# Altium PCB mach nhan tin hieu.PcbDoc (part 1 of 2)
Units mm, origin at the board's own origin, x right, y up, seen from the top; angles counter-clockwise.
Board outline 399.55 x 164.38 mm, 2 copper layers (Top Layer, Bottom Layer); 171 components, 209 nets, 595 pads, 30 vias.
Unrouted connection lines stored in the file: 1.
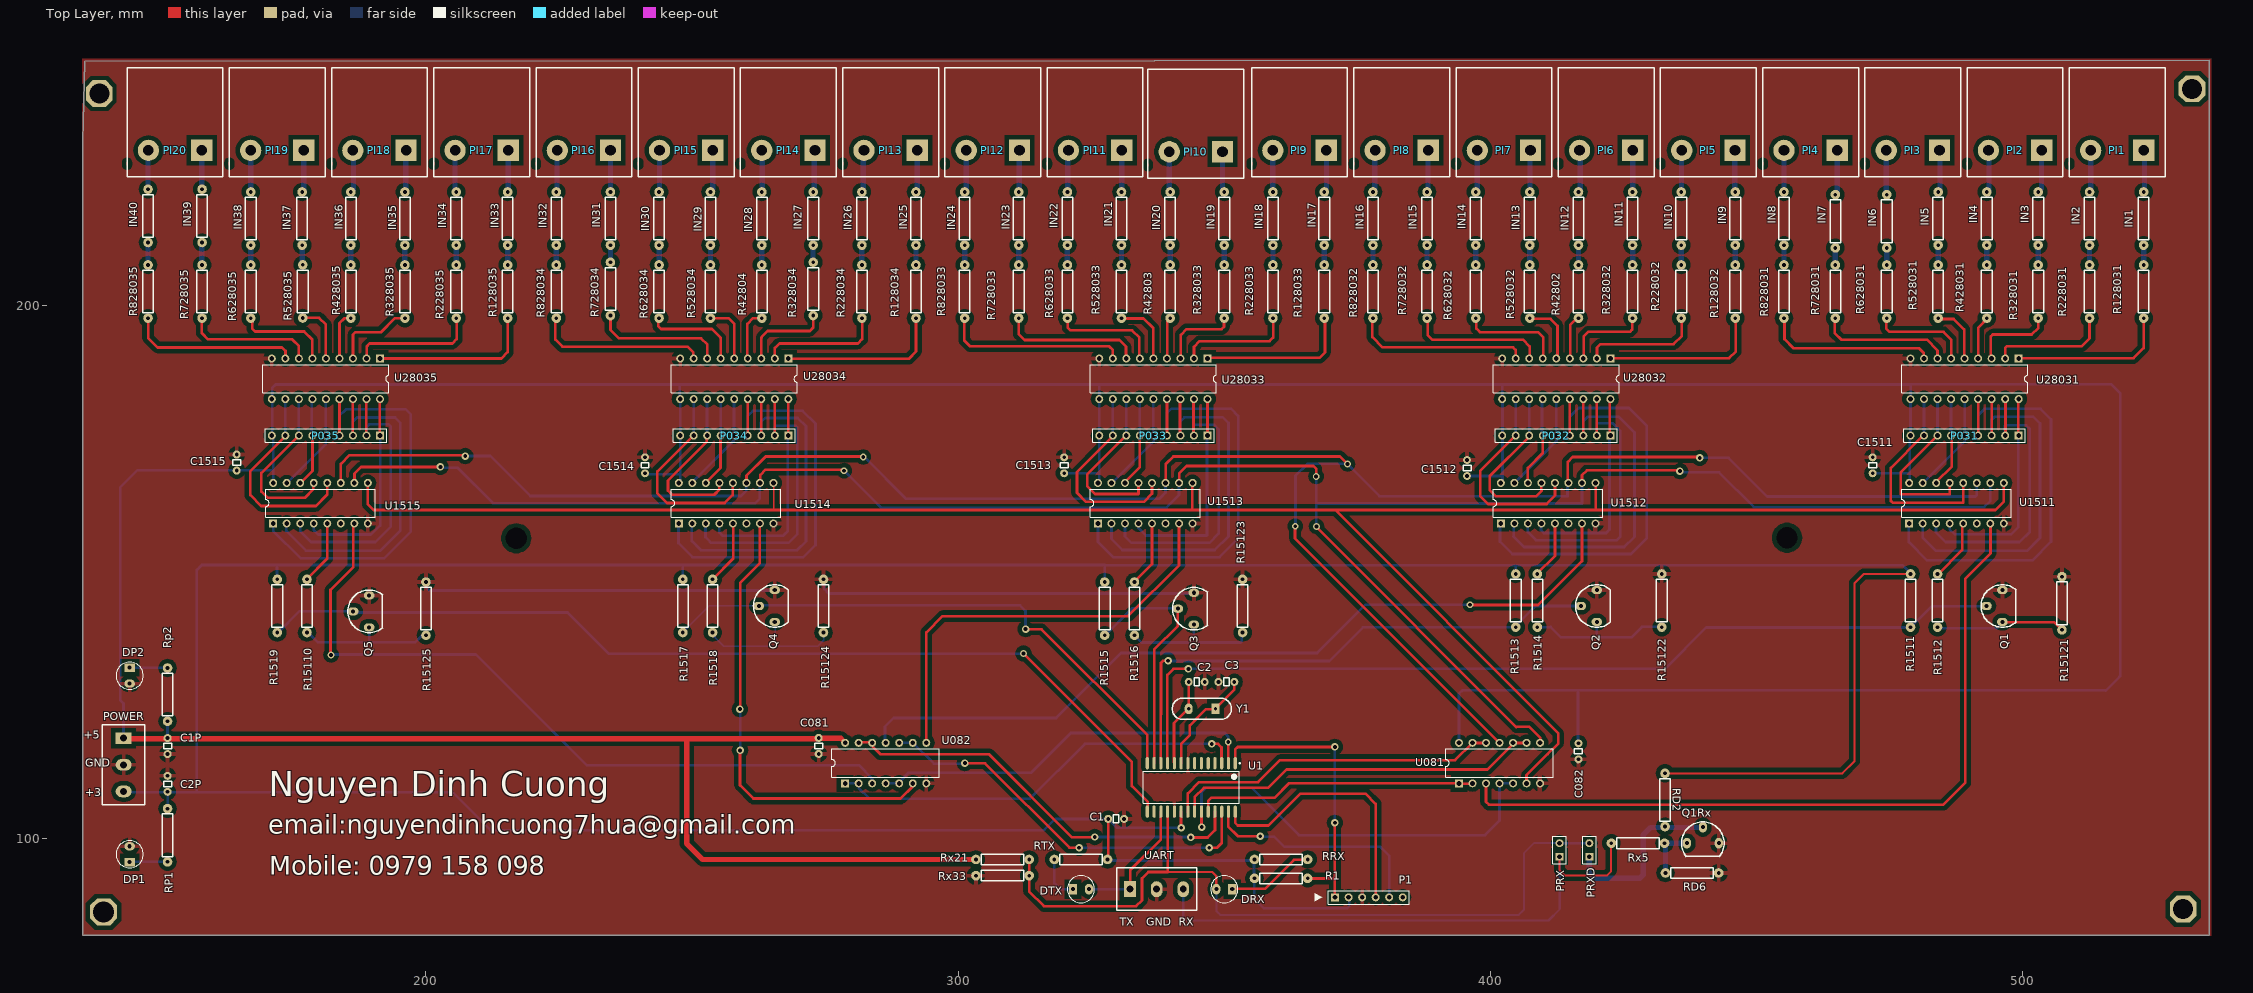
[diagram p0: Top Layer view]
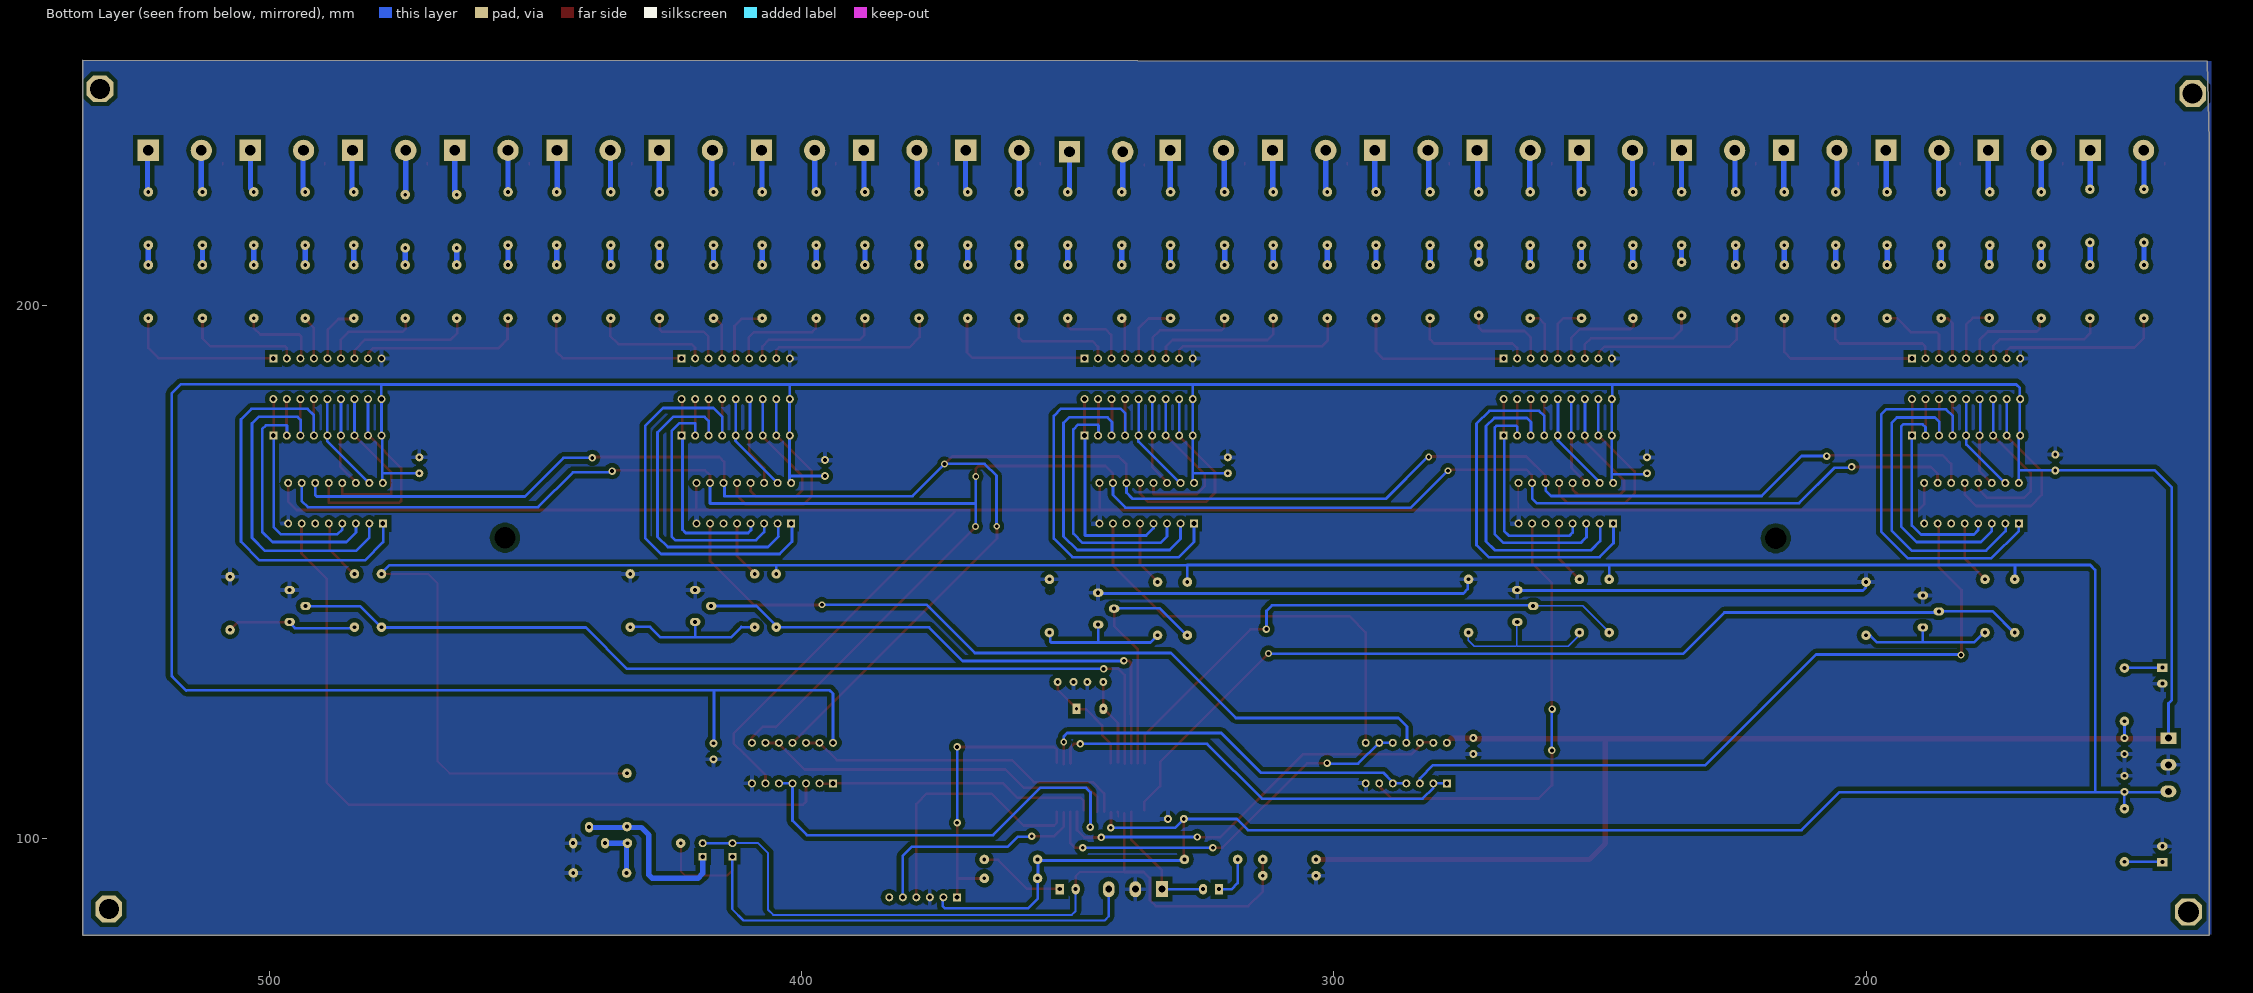
[diagram p1: Bottom Layer view, seen from below]

## Layer stack, top to bottom
Top Layer: signal copper 0.0356
Dielectric: dielectric 0.32, FR-4, Dk 4.8
Bottom Layer: signal copper 0.0356

## Board outline
135.55,230.85 135.55,81.8 535.1,81.8 535.075,246.175 336.85,246.025 135.925,245.975

## Design rules (kind name [scope] priority, off if disabled: settings)
Clearance [All] p1: gap=0.8
ComponentClearance [All] p1: gap=0.254 collisioncheckmode=3 verticalgap=0.254
PlaneClearance [All] p1: clearance=0.8
PlaneConnect [All] p1: planeconnectstyle=Relief reliefexpansion=1 reliefentries=4 reliefconductorwidth=1 reliefairgap=0.8
PolygonConnect [All] p1: connectstyle=Relief reliefconductorwidth=0.8 reliefentries=4 polygonreliefangle="90 Angle"
RoutingVias [All] p1: holewidth=0.711 width=1.27 viastyle="Through Hole" minholewidth=0.711 minwidth=1.27 maxholewidth=0.711 maxwidth=1.27
SolderMaskExpansion [All] p1: expansion=0.102
TestPointUsage [All] p1: valid=0 allowmultiple=FALSE
Testpoint [All] p1: side=15 testpointundercomponent=TRUE minsize=1.016 maxsize=2.54 preferedsize=1.524 minholesize=0 maxholesize=1.016 preferedholesize=0.813 testpointgrid=0.025 style=1023 order=0-112345678
Width [All] p1: maxlimit=0.4 minlimit=0.4 preferedwidth=0.4
16 further rules are at their usual default settings.

## Components (designator, comment, footprint, x,y, rotation, side; value= is the part's Value field where it differs from the comment)
C1 "Cap" tu_gom 330.2,103.632 r0 top
C1P "Cap" tu_gom 151.5,116.811 r270 top
C2 "Cap2" tu_gom 345.341,129.357 r0 top
C2P "Cap" tu_gom 151.5,110.715 r90 top
C3 "Cap2" tu_gom 349.913,129.357 r180 top
C081 "Cap" tu_gom 273.812,116.84 r270 top
C082 "Cap" tu_gom 416.56,115.824 r270 top
C1511 "Cap" tu_gom 471.824,170.559 r90 top
C1512 "Cap" tu_gom 395.624,170.051 r90 top
C1513 "Cap" tu_gom 319.932,170.559 r90 top
C1514 "Cap" tu_gom 241.192,170.559 r90 top
C1515 "Cap" tu_gom 164.484,171.067 r90 top
DP1 "LED0" LED_3 144.388,96.491 r90 top
DP2 "LED0" LED_3 144.388,131.035 r270 top
DRX "LED0" LED_3 350.52,90.424 r180 top
DTX "LED0" LED_3 322.58,90.424 r0 top
IN1 "Res" R_Nor 522.732,216.408 r270 top (schematic designator R111)
IN2 "Res" R_Nor 512.572,216.408 r270 top (schematic designator R2)
IN3 "Res" R_Nor 502.92,216.408 r270 top (schematic designator R3)
IN4 "Res" R_Nor 493.268,216.408 r270 top (schematic designator R4)
IN5 "Res" R_Nor 484.124,216.408 r270 top (schematic designator R5)
IN6 "Res" R_Nor 474.472,215.9 r270 top (schematic designator R6)
IN7 "Res" R_Nor 464.82,215.9 r270 top (schematic designator R7)
IN8 "Res" R_Nor 455.168,216.408 r270 top (schematic designator R8)
IN9 "Res" R_Nor 446.024,216.408 r270 top (schematic designator R9)
IN10 "Res" R_Nor 435.864,216.408 r270 top (schematic designator R10)
IN11 "Res" R_Nor 426.72,216.408 r270 top (schematic designator R11)
IN12 "Res" R_Nor 416.56,216.408 r270 top (schematic designator R12)
IN13 "Res" R_Nor 407.416,216.408 r270 top (schematic designator R13)
IN14 "Res" R_Nor 397.256,216.408 r270 top (schematic designator R14)
IN15 "Res" R_Nor 388.112,216.408 r270 top (schematic designator R15)
IN16 "Res" R_Nor 377.952,216.408 r270 top (schematic designator R16)
IN17 "Res" R_Nor 368.808,216.408 r270 top (schematic designator R17)
IN18 "Res" R_Nor 359.156,216.408 r270 top (schematic designator R18)
IN19 "Res" R_Nor 350.012,216.408 r270 top (schematic designator R19)
IN20 "Res" R_Nor 339.852,216.408 r270 top (schematic designator R20)
IN21 "Res" R_Nor 330.708,216.408 r270 top (schematic designator R21)
IN22 "Res" R_Nor 320.548,216.408 r270 top (schematic designator R22)
IN23 "Res" R_Nor 311.404,216.408 r270 top (schematic designator R23)
IN24 "Res" R_Nor 301.244,216.408 r270 top (schematic designator R24)
IN25 "Res" R_Nor 292.1,216.408 r270 top (schematic designator R25)
IN26 "Res" R_Nor 281.94,216.408 r270 top (schematic designator R26)
IN27 "Res" R_Nor 272.796,216.408 r270 top (schematic designator R27)
IN28 "Res" R_Nor 263.144,216.408 r270 top (schematic designator R28)
IN29 "Res" R_Nor 253.492,216.408 r270 top (schematic designator R29)
IN30 "Res" R_Nor 243.84,216.408 r270 top (schematic designator R30)
IN31 "Res" R_Nor 234.696,216.408 r270 top (schematic designator R31)
IN32 "Res" R_Nor 224.536,216.408 r270 top (schematic designator R32)
IN33 "Res" R_Nor 215.392,216.408 r270 top (schematic designator R33)
IN34 "Res" R_Nor 205.74,216.408 r270 top (schematic designator R34)
IN35 "Res" R_Nor 196.088,216.408 r270 top (schematic designator R35)
IN36 "Res" R_Nor 185.928,216.408 r270 top (schematic designator R36)
IN37 "Res" R_Nor 176.784,216.408 r270 top (schematic designator R37)
IN38 "Res" R_Nor 167.132,216.408 r270 top (schematic designator R38)
IN39 "Res" R_Nor 157.988,216.916 r270 top (schematic designator R39)
IN40 "Res" R_Nor 147.828,216.916 r270 top (schematic designator R40)
P1 "PICKIT3" HDR1X6 370.84,88.9 r0 top
P031 "Header 9" HDR1X9 499.256,175.639 r180 top
P032 "Header 9" HDR1X9 422.548,175.639 r180 top
P033 "Header 9" HDR1X9 346.856,175.639 r180 top
P034 "Header 9" HDR1X9 268.116,175.639 r180 top
P035 "Header 9" HDR1X9 191.408,175.639 r180 top
PI1 "Header 2" Header_nguon_20A 522.78,229.221 r180 top
PI2 "Header 2" Header_nguon_20A 503.576,229.221 r180 top
PI3 "Header 2" Header_nguon_20A 484.372,229.221 r180 top
PI4 "Header 2" Header_nguon_20A 465.168,229.221 r180 top
PI5 "Header 2" Header_nguon_20A 445.964,229.221 r180 top
PI6 "Header 2" Header_nguon_20A 426.76,229.221 r180 top
PI7 "Header 2" Header_nguon_20A 407.556,229.221 r180 top
PI8 "Header 2" Header_nguon_20A 388.352,229.221 r180 top
PI9 "Header 2" Header_nguon_20A 369.148,229.221 r180 top
PI10 "Header 2" Header_nguon_20A 349.679,228.967 r180 top
PI11 "Header 2" Header_nguon_20A 330.74,229.221 r180 top
PI12 "Header 2" Header_nguon_20A 311.535,229.221 r180 top
PI13 "Header 2" Header_nguon_20A 292.331,229.221 r180 top
PI14 "Header 2" Header_nguon_20A 273.127,229.221 r180 top
PI15 "Header 2" Header_nguon_20A 253.923,229.221 r180 top
PI16 "Header 2" Header_nguon_20A 234.719,229.221 r180 top
PI17 "Header 2" Header_nguon_20A 215.515,229.221 r180 top
PI18 "Header 2" Header_nguon_20A 196.311,229.221 r180 top
PI19 "Header 2" Header_nguon_20A 177.107,229.221 r180 top
PI20 "Header 2" Header_nguon_20A 157.903,229.221 r180 top
POWER "Header 3" HEADER3 143.256,113.792 r270 top
PRX "Header 2" HDR1X2 413.004,96.52 r90 top (schematic designator PUA2)
PRXD "Header 2" HDR1X2 418.592,96.52 r90 top (schematic designator PUA1)
Q1 "C1815" C1815 495.7,143.127 r90 top
Q1Rx "C1815" C1815 439.42,99.568 r0 top
Q2 "C1815" C1815 419.5,143.127 r90 top
Q3 "C1815" C1815 343.808,142.619 r90 top
Q4 "C1815" C1815 265.068,143.127 r90 top
Q5 "C1815" C1815 188.868,142.111 r90 top
R1 "Res3" R_Nor 360.68,92.456 r180 top
R1511 "Res3" R_Nor 478.936,144.651 r90 top
R1512 "Res3" R_Nor 484.016,144.651 r90 top
R1513 "Res3" R_Nor 404.768,144.651 r90 top
R1514 "Res3" R_Nor 408.832,144.651 r90 top
R1515 "Res3" R_Nor 327.552,143.127 r90 top
R1516 "Res3" R_Nor 333.14,143.127 r90 top
R1517 "Res3" R_Nor 248.304,143.635 r90 top
R1518 "Res3" R_Nor 253.892,143.635 r90 top
R1519 "Res3" R_Nor 172.104,143.635 r90 top
R15110 "Res3" R_Nor 177.692,143.635 r90 top
R15121 "Res3" R_Nor 507.384,144.143 r90 top
R15122 "Res3" R_Nor 432.2,144.651 r90 top
R15123 "Res3" R_Nor 353.46,143.635 r90 top
R15124 "Res3" R_Nor 274.72,143.635 r90 top
R15125 "Res3" R_Nor 200.044,143.127 r90 top
R42802 "Res3" R_Nor 416.56,202.692 r90 top
R42803 "Res3" R_Nor 339.852,202.692 r90 top
R42804 "Res3" R_Nor 263.144,202.692 r90 top
R128031 "Res3" R_Nor 522.732,202.692 r90 top
R128032 "Res3" R_Nor 446.024,202.692 r90 top
R128033 "Res3" R_Nor 368.808,202.692 r90 top
R128034 "Res3" R_Nor 292.1,202.692 r90 top
R128035 "Res3" R_Nor 215.392,202.692 r90 top
R228031 "Res3" R_Nor 512.572,202.692 r90 top
R228032 "Res3" R_Nor 435.864,202.692 r90 top
R228033 "Res3" R_Nor 359.156,202.692 r90 top
R228034 "Res3" R_Nor 281.94,202.692 r90 top
R228035 "Res3" R_Nor 205.74,202.692 r90 top
R328031 "Res3" R_Nor 502.92,202.692 r90 top
R328032 "Res3" R_Nor 426.72,202.692 r90 top
R328033 "Res3" R_Nor 350.012,202.692 r90 top
R328034 "Res3" R_Nor 272.796,203.2 r90 top
R328035 "Res3" R_Nor 196.088,202.692 r90 top
R428031 "Res3" R_Nor 493.268,202.692 r90 top
R428035 "Res3" R_Nor 185.928,202.692 r90 top
R528031 "Res3" R_Nor 484.124,202.692 r90 top
R528032 "Res3" R_Nor 407.416,202.692 r90 top
R528033 "Res3" R_Nor 330.708,202.692 r90 top
R528034 "Res3" R_Nor 253.492,202.692 r90 top
R528035 "Res3" R_Nor 176.898,202.726 r90 top
R628031 "Res3" R_Nor 474.472,202.692 r90 top
R628032 "Res3" R_Nor 397.256,202.692 r90 top
R628033 "Res3" R_Nor 320.548,202.692 r90 top
R628034 "Res3" R_Nor 243.84,202.692 r90 top
R628035 "Res3" R_Nor 167.132,202.692 r90 top
R728031 "Res3" R_Nor 464.82,202.692 r90 top
R728032 "Res3" R_Nor 388.112,202.692 r90 top
R728033 "Res3" R_Nor 311.404,202.692 r90 top
R728034 "Res3" R_Nor 234.696,203.2 r90 top
R728035 "Res3" R_Nor 157.988,202.692 r90 top
R828031 "Res3" R_Nor 455.168,202.692 r90 top
R828032 "Res3" R_Nor 377.952,202.692 r90 top
R828033 "Res3" R_Nor 301.244,202.692 r90 top
R828034 "Res3" R_Nor 224.536,202.692 r90 top
R828035 "Res3" R_Nor 147.828,202.692 r90 top
RD2 "Res3" R_Nor 432.816,107.188 r270 top
RD6 "Res3" R_Nor 437.896,93.472 r180 top
RP1 "Res3" R_Nor 151.5,100.555 r270 top
Rp2 "Res3" R_Nor 151.5,126.971 r90 top
RRX "Res3" R_Nor 360.68,96.012 r0 top
RTX "Res3" R_Nor 323.088,96.012 r180 top
Rx5 "Res3" R_Nor 427.736,99.06 r0 top
Rx21 "330R" R_Nor 308.356,96.012 r180 top
Rx33 "220R" R_Nor 308.356,92.964 r0 top
U1 "PIC18F26K20" SOIC300-28_N 343.817,109.545 r270 top
U081 "74AC08B" DIP14 401.729,114.117 r0 top
U082 "74AC08B" DIP14 286.413,114.117 r0 top
U1511 "74F151APC" N16E 487.572,162.939 r0 top
U1512 "74F151APC" N16E 410.864,162.939 r0 top
U1513 "74F151APC" N16E 335.172,162.939 r0 top
U1514 "74F151APC" N16E 256.432,162.939 r0 top
U1515 "74F151APC" N16E 180.232,162.939 r0 top
U28031 "ULN2803A" DIP18 489.096,186.307 r180 top
U28032 "ULN2803A" DIP18 412.388,186.307 r180 top
U28033 "ULN2803A" DIP18 336.696,186.307 r180 top
U28034 "ULN2803A" DIP18 257.956,186.307 r180 top
U28035 "ULN2803A" DIP18 181.248,186.307 r180 top
UART "Header 3" HEADER3 337.312,90.424 r0 top
Y1 "8MHz" Xtal12M 345.341,126.309 r180 top

## Footprints (in the part's own frame and the unit in brackets; to place one, negate y for a bottom-side part, rotate by r counter-clockwise, add the part's x,y. Pads: shape width x height; smd on the part's side, far side on the other; paste and mask are expansions set on the pad)
C1815 [mil]
  oval 60x78.74 hole 30: 1(137.8,-19.68) 2(19.69,98.43) 3(-98.43,-19.68)
  silkscreen extent -138,-121 177,138
DIP14 [mm] "DIP; 14 Leads; Row Spacing 7.62 mm; Pitch 2.54 mm"
  rect 1.5x1.5 hole 0.9: 1(-7.62,-3.81)
  round 1.5 hole 0.9: 2(-5.08,-3.81) 3(-2.54,-3.81) 4(0,-3.81) 5(2.54,-3.81) 6(5.08,-3.81) 7(7.62,-3.81) 8(7.62,3.81) 9(5.08,3.81) 10(2.54,3.81) 11(0,3.81) 12(-2.54,3.81) 13(-5.08,3.81) 14(-7.62,3.81)
  silkscreen extent -10.1,-2.65 10.1,2.65
DIP18 [mm] "DIP; 18 Leads; Row Spacing 7.62 mm; Pitch 2.54 mm"
  rect 1.5x1.5 hole 0.9: 1(-10.16,-3.81)
  round 1.5 hole 0.9: 2(-7.62,-3.81) 3(-5.08,-3.81) 4(-2.54,-3.81) 5(0,-3.81) 6(2.54,-3.81) 7(5.08,-3.81) 8(7.62,-3.81) 9(10.16,-3.81) 10(10.16,3.81) 11(7.62,3.81) 12(5.08,3.81) 13(2.54,3.81) 14(0,3.81) 15(-2.54,3.81) 16(-5.08,3.81) 17(-7.62,3.81) 18(-10.16,3.81)
  silkscreen extent -11.85,-2.65 11.85,2.65
HDR1X2 [mm] "Connector; Header; 2 Position"
  rect 1.5x1.5 hole 0.9: 1(0,0)
  round 1.5 hole 0.9: 2(2.54,0)
  silkscreen extent -1.27,-1.27 3.81,1.27
HDR1X6 [mm] "Connector; Header; 6 Position"
  rect 1.5x1.5 hole 0.9: 1(0,0)
  round 1.5 hole 0.9: 2(2.54,0) 3(5.08,0) 4(7.62,0) 5(10.16,0) 6(12.7,0)
  silkscreen extent -1.27,-1.27 13.97,1.27
HDR1X9 [mm] "Connector; Header; 9 Position"
  rect 1.5x1.5 hole 0.9: 1(0,0)
  round 1.5 hole 0.9: 2(2.54,0) 3(5.08,0) 4(7.62,0) 5(10.16,0) 6(12.7,0) 7(15.24,0) 8(17.78,0) 9(20.32,0)
  silkscreen extent -1.27,-1.27 21.59,1.27
HEADER3 [mm]
  rect 2.2x3 hole 1.3: 1(-5,0)
  oval 2.2x3 hole 1.3: 2(0,0) 3(5,0)
  silkscreen extent -7.5,-4 7.5,4
Header_nguon_20A [mm]
  rect 4x4 hole 2: 1(0,0)
  round 4 hole 2: 2(10,0)
  Top Layer lines w0.254: 14,2.754 14,2.246
  silkscreen extent -4,-15.5 14,5
LED_3 [mm]
  rect 1.524x2 hole 0.762: 1(-1,0)
  oval 1.524x2 hole 0.762: 2(2,0)
  silkscreen extent -2.05,-2.55 3.05,2.55
N16E [mm] "DIP; 16 Leads; Row Spacing 7.62 mm; Pitch 2.54 mm"
  rect 1.5x1.5 hole 0.9: 1(-8.89,-3.81)
  round 1.5 hole 0.9: 2(-6.35,-3.81) 3(-3.81,-3.81) 4(-1.27,-3.81) 5(1.27,-3.81) 6(3.81,-3.81) 7(6.35,-3.81) 8(8.89,-3.81) 9(8.89,3.81) 10(6.35,3.81) 11(3.81,3.81) 12(1.27,3.81) 13(-1.27,3.81) 14(-3.81,3.81) 15(-6.35,3.81) 16(-8.89,3.81)
  silkscreen extent -10.3,-2.65 10.3,2.65
R_Nor [mm]
  round 1.8 hole 0.7: 1(-5,0) 2(5,0)
  silkscreen extent -4,-1 4,1
SOIC300-28_N [mm] "SOIC, 28-Leads, Body 17.9x7.5mm, Pitch 1.27mm, IPC Medium Density"
  oval 2.3x0.6 smd: 1(-4.55,8.255) 2(-4.55,6.985) 3(-4.55,5.715) 4(-4.55,4.445) 5(-4.55,3.175) 6(-4.55,1.905) 7(-4.55,0.635) 8(-4.55,-0.635) 9(-4.55,-1.905) 10(-4.55,-3.175) 11(-4.55,-4.445) 12(-4.55,-5.715) 13(-4.55,-6.985) 14(-4.55,-8.255) 15(4.55,-8.255) 16(4.55,-6.985) 17(4.55,-5.715) 18(4.55,-4.445) 19(4.55,-3.175) 20(4.55,-1.905) 21(4.55,-0.635) 22(4.55,0.635) 23(4.55,1.905) 24(4.55,3.175) 25(4.55,4.445) 26(4.55,5.715) 27(4.55,6.985) 28(4.55,8.255)
  silkscreen extent -4.67,-9.05 3,9.23, body extent -3.8,-9.06 3.8,9.06, height 2.65
tu_gom [mm]
  round 1.5 hole 0.7: 1(-2,0) 2(1,0)
  silkscreen extent -1,-0.75 0,0.75
Xtal12M [mm]
  rect 1.5x2 hole 0.6: 1(-3,2)
  oval 1.5x2 hole 0.6: 2(2,2)
  silkscreen extent -6,0 5.1,4

## Part data
C1 C1P C2 C2P C3 C081 C082 C1511 C1512 C1513 C1514 C1515: "Capacitor"
DP1 DP2 DRX DTX: "Typical INFRARED GaAs LED"
P1: library part "Header 6", "Header, 6-Pin"
P031 P032 P033 P034 P035: "Header, 9-Pin"
PI1 PI2 PI3 PI4 PI5 PI6 PI7 PI8 PI9 PI10 PI11 PI12 PI13 PI14 PI15 PI16 PI17 PI18 PI19 PI20 PRX PRXD: "Header, 2-Pin"
POWER UART: "Header, 3-Pin"
R1 R1511 R1512 R1513 R1514 R1515 R1516 R1517 R1518 R1519 R15110 R15121 R15122 R15123 R15124 R15125 R42802 R42803 R42804 R128031 R128032 R128033 R128034 R128035 R228031 R228032 R228033 R228034 R228035 R328031 R328032 R328033 R328034 R328035 R428031 R428035 R528031 R528032 R528033 R528034 R528035 R628031 R628032 R628033 R628034 R628035 R728031 R728032 R728033 R728034 R728035 R828031 R828032 R828033 R828034 R828035 RD2 RD6 RP1 Rp2 RRX RTX Rx5: "Resistor"
Rx21 Rx33: library part Res
U1: library part PIC18F242-E/SO, "High Performance, Enhanced FLASH Microcontroller with 10-Bit A/D, 16K FLASH, 28-Pin SOIC, Standard Volt Range, Extended Temperature"
U081 U082: "Quad 2-Input AND Gate"
U1511 U1512 U1513 U1514 U1515: "8-Input Multiplexer"
U28031 U28032 U28033 U28034 U28035: "Eight Darlington Array"
Y1: library part XTAL, "Crystal Oscillator"

## Free pads (board coordinates)
  oct 5x5 hole 4: 2(139.475,86.15)
  oct 5x5 hole 3.8: 3(530.15,86.7) 4(531.825,240.775) 60(138.7,239.9)
  round 1.524 hole 4: 6(455.75,156.45) 8(217,156.35)

## Via types
v1: diameter 1.4, hole 0.711, Top Layer to Bottom Layer, 20 vias
v2: diameter 1.27, hole 0.711, Top Layer to Bottom Layer, 9 vias
v3: diameter 1.4, hole 0.72, Top Layer to Bottom Layer, 1 vias

## Nets (pads, with @x,y where several pads share a name; then routed paths per layer and width w, separated by ;. In a path a pad name is that pad's centre, name@x,y a point inside that pad or via, vN(x,y) a via of type N, cw(c..) or ccw(c..) an arc to the next point about the centre after c; other vN are vias at no path point)
+3V: C1.1 C2P.1 P1.2 POWER.3 R1.2 R1511.2 R1513.2 R1515.2 R1517.2 R1519.2 RD2.1 RP1.1 RRX.1 RTX.1 U1.20 | length 728.7
  Top Layer w0.4: RD2.1@432.816,112.188 466.138,112.188 468.425,114.475 468.425,147.925 470.15,149.65 R1511.2@478.925,149.65
  Top Layer w0.5: RTX.1@328.25,95.95 328.25,96.012 328.25,103.632 C1.1@328.25,103.65 ; v1@341.9,101.925 341.9,101.975 U1.20@341.9,104.925
  Bottom Layer w0.254: POWER.3@143.1,108.675 143.119,108.656 143.125,108.65 POWER.3@143.256,108.65 ; C2P.1@151.338,108.763 151.395,108.82 C2P.1@151.4,108.825 ; RP1.1@151.475,105.475 151.527,105.528 RP1.1@151.55,105.55 ; C2P.1@151.5,108.65 C2P.1@151.525,108.65 ; C2P.1@151.5,108.715 C2P.1@151.525,108.715 ; 251.3,151.325 251.375,151.4 ; 404.768,151.207 404.861,151.3
  Bottom Layer w0.5: POWER.3@143.175,108.65 143.256,108.65 151.5,108.65 205.05,108.65 212.175,101.525 316.15,101.525 318.25,103.625 C1.1@328.15,103.625 ; RP1.1@151.55,105.55 151.55,105.555 C2P.1@151.55,108.65 ; 157,108.725 157,150.4 157.925,151.325 251.3,151.325 327.6,151.325 ; R1519.2@172.05,148.65 172.05,151.125 ; R1517.2@248.304,148.635 248.304,151.296 ; 327.45,151.3 404.861,151.3 477.475,151.3 R1511.2@479,149.775 ; R1515.2@327.552,148.127 327.552,151.248 ; C1.1@328.325,103.625 328.2,103.625 C1.1@328.15,103.625 ; RTX.1@328.479,95.829 RRX.1@355.6,95.829 ; v1(341.925,101.975) 329.8,101.975 328.172,103.603 C1.1@328.15,103.625 ; RRX.1@355.6,95.95 RRX.1@355.6,95.829 ; RRX.1@355.65,95.829 RRX.1@355.6,95.829 ; P1.2@373.5,88.925 373.5,88.9 373.5,87.275 373.05,86.825 357.5,86.825 355.637,88.688 355.637,92.413 355.6,92.45 355.6,92.456 RRX.1@355.6,95.829 ; R1513.2@404.768,149.651 404.768,151.207
A: U081.11 U1511.11 U1512.11 U1513.11 U1514.11 U1515.11 | length 421.3
  Top Layer w0.254: U1514.11@260.275,166.9 260.334,166.841 U1514.11@260.45,166.725
  Top Layer w0.5: U1515.11@184.05,166.725 184.05,166.749 184.05,170.3 185.7,171.95 207.425,171.95 v1@207.509,171.95 ; U1514.11@260.275,166.9 260.275,168.1 263.875,171.7 282.175,171.7 v2@282.34,171.7 ; U1513.11@339.025,167 339.025,170.3 340.45,171.725 371.75,171.725 v2(373.175,170.3) ; v2@363.3,158.4 363.3,156.3 401.701,117.899 U081.11@401.712,117.888 ; U1512.11@414.55,166.55 414.55,166.749 414.55,170.7 415.475,171.625 439.35,171.625 v1@439.409,171.625
  Bottom Layer w0.254: v2@282,171.625 v2(282.175,171.625) v2@282.4,171.625
  Bottom Layer w0.5: v1(207.425,171.8) 212.15,171.8 219.658,164.292 259.242,164.292 260.242,165.292 U1514.11@260.242,166.749 ; v2@282.4,171.625 290.25,163.775 337.85,163.775 338.982,164.907 U1513.11@338.982,166.749 ; v2@363.4,158.65 363.4,168.1 365.625,170.325 v2@373.15,170.325 ; v2(373.175,170.3) 373.175,170.275 379.175,164.275 414.5,164.275 U1512.11@414.5,166.7 ; v1(439.35,171.45) 444.75,171.45 452,164.2 491.1,164.2 491.382,164.482 U1511.11@491.382,166.749
  other v2: 363.35,158.6
AP: U1.21 U081.12 U081.13 | length 63.7
  Top Layer w0.254: U081.12@399.325,117.875 U081.12@399.4,117.8
  Top Layer w0.5: U1.21@343.182,104.995 343.182,108.432 345.275,110.525 356.375,110.525 360.525,114.675 393.4,114.675 396.65,117.925 U081.13@396.825,118.1 ; U081.13@396.825,117.875 399.189,117.875 U081.12@399.325,117.875
B: U081.8 U1511.10 U1512.10 U1513.10 U1514.10 U1515.10 | length 408.5
  Top Layer w0.254: v2@367.4,158.35 v2@367.4,158.5 ; U1512.10@417.225,166.975 417.332,166.867 U1512.10@417.375,166.825
  Top Layer w0.5: U1515.10@186.625,166.725 186.625,166.749 186.625,168.525 187.85,169.75 v1@202.65,169.75 ; U1514.10@262.85,166.725 262.85,166.749 262.85,168.225 263.85,169.225 278.6,169.225 v2@278.764,169.225 ; U1513.10@341.55,166.725 341.55,166.749 341.55,168.55 342.925,169.925 366.75,169.925 367.3,169.375 v2@367.3,168 ; v2@367.4,158.35 404.838,120.913 404.839,120.912 ; 404.837,120.912 404.839,120.912 ; 404.876,120.876 404.839,120.912 ; U081.8@409.349,117.927 409.349,118.901 407.337,120.912 404.839,120.912 ; U1512.10@417.225,166.975 417.225,168.225 418.125,169.125 435.625,169.125 v1@435.762,169.125
  Bottom Layer w0.5: v1@202.875,169.6 206,169.6 212.65,162.95 261.925,162.95 262.725,163.75 U1514.10@262.725,166.65 ; v2(278.6,169.05) 285.55,162.1 339.15,162.1 341.522,164.472 U1513.10@341.522,166.749 ; v2@367.275,158.575 367.275,162.85 ; v2@367.275,167.725 367.275,162.875 417.214,162.875 U1512.10@417.214,166.749 ; v1@435.55,168.725 435.625,168.725 442.975,168.725 449.5,162.2 492.775,162.2 493.922,163.347 U1511.10@493.922,166.749
  other v1: 435.625,168.975 202.75,169.75
  other v2: 367.35,158.575 367.275,167.975
BP: U1.22 U081.9 U081.10 | length 69.2
  Top Layer w0.254: 344.452,107.402 344.477,107.402 ; U081.9@406.5,117.875 U081.9@406.65,118.025
  Top Layer w0.5: U1.22@344.452,104.995 344.452,107.402 344.452,107.702 346.2,109.45 358.225,109.45 361.7,112.925 399.475,112.925 404.373,117.823 404.425,117.875 U081.9@406.5,117.875
C: U081.6 U1511.9 U1512.9 U1513.9 U1514.9 U1515.9 | length 402.4
  Top Layer w0.254: U1514.9@265.325,166.7 U1514.9@265.375,166.65 ; 265.375,161.725 U1514.9@265.375,166.65 ; U1514.9@265.375,166.725 U1514.9@265.375,166.65 ; U1513.9@343.994,166.681 U1513.9@344,166.675 ; 370.775,161.625 370.91,161.625 ; 410.762,115.813 410.779,115.829 ; U1512.9@419.8,166.575 419.864,166.639 U1512.9@419.95,166.725 ; 419.875,161.6 419.95,161.675
  Top Layer w0.5: U1515.9@189.122,166.749 189.122,162.728 190.2,161.65 419.875,161.65 ; 344,161.725 344,166.675 U1513.9@344,166.749 ; 370.91,161.625 412.789,119.714 412.789,117.814 410.775,115.8 ; U081.6@406.809,110.307 406.809,111.859 410.762,115.813 ; U1512.9@419.8,166.575 419.8,161.725 419.875,161.65 ; 419.9,161.65 419.875,161.65 ; 419.95,161.675 494.9,161.675 496.4,163.175 ; 496.462,163.387 U1511.9@496.462,166.749
CP: U1.23 U081.4 U081.5 | length 80.6
  Top Layer w0.254: U081.4@401.7,110.475 401.798,110.376 U081.4@401.85,110.325
  Top Layer w0.5: U1.23@345.725,104.85 345.725,102.25 v3@345.8,102.175
  Bottom Layer w0.254: 346.575,109.475 346.625,109.475 346.65,109.5 ; U081.4@401.729,110.225 401.75,110.225 401.78,110.255 U081.4@401.825,110.3 ; U081.4@401.825,110.225 U081.4@401.825,110.3 ; U081.4@401.825,110.65 401.825,110.307 U081.4@401.825,110.3 ; U081.4@401.832,110.307 U081.4@401.825,110.3
  Bottom Layer w0.5: v3@345.725,102.05 345.725,102.1 345.725,108.625 346.575,109.475 ; 346.65,109.5 355.1,109.5 364.025,100.575 399,100.575 401.729,103.304 U081.4@401.729,110.225 ; U081.4@401.832,110.307 U081.5@404.269,110.307
  other v3: 345.775,102.1
GND: C1.2 C1P.2 C2.2 C2P.2 C3.2 C081.2 C082.2 C1511.2 C1512.2 C1513.2 C1514.2 C1515.2 DP1.2 DP2.2 P1.3 POWER.2 Q1.1 Q1Rx.1 Q2.1 Q3.1 Q4.1 Q5.1 R15121.2 R15122.2 R15123.2 R15124.2 R15125.2 RD6.1 Rx33.1 U1.8 U1.19 U081.7 U082.7 U1511.8 U1512.8 U1513.8 U1514.8 U1515.8 U28031.9 U28032.9 U28033.9 U28034.9 U28035.9 UART.2 | length 143.1
  Top Layer w0.254: DP1.2@144.425,98.4 144.45,98.425 DP1.2@144.55,98.425 ; U082.7@293.975,110.325 294.013,110.287 294.033,110.267 U082.7@294.05,110.25 ; U1.19@340.525,103.95 U1.19@340.525,104.975 ; C3.2@348.768,129.357 C3.2@348.775,129.35 ; Q1.1@496.325,146.6 496.375,146.65 Q1.1@496.462,146.737
  Top Layer w0.5: Q5.1@189.2,145.625 Q5.1@189.368,145.625 ; Q4.1@265.55,146.6 Q4.1@265.568,146.6 ; R15124.2@274.827,148.527 R15124.2@274.875,148.575 ; U082.7@294.033,110.267 U082.7@294.033,110.307 ; U1.19@340.65,104.8 U1.19@340.65,104.995 ; Q3.1@344.175,146.15 Q3.1@344.308,146.15 ; Q2.1@419.7,146.825 Q2.1@420,146.825 ; Q1.1@496.325,146.65 Q1.1@496.375,146.65 ; R15121.2@507.275,149.2 R15121.2@507.384,149.2
  Top Layer w1: POWER.2@143.256,113.85 POWER.2@143.425,113.85 ; RD6.1@442.875,93.45 RD6.1@442.896,93.472
  Bottom Layer w0.254: POWER.2@143.25,113.825 POWER.2@143.256,113.825 ; C2P.2@151.425,111.6 C2P.2@151.5,111.675 ; 200.1,147.075 200.1,148.127 R15125.2@200.1,148.45 ; U081.7@409.175,110.075 U081.7@409.25,110.15 ; R15122.2@432.075,149.775 432.075,149.651 432.075,149.425 432.175,149.525 R15122.2@432.25,149.6 ; Q1.1@496.175,146.6 496.201,146.626 Q1.1@496.275,146.7
  Bottom Layer w0.5: C2P.2@151.5,111.675 C2P.2@151.5,111.715 ; 200.1,147.075 200.65,146.525 Q4.1@265.425,146.525 ; R15124.2@274.875,148.65 274.875,148.635 274.875,146.8 275.7,145.975 Q3.1@344.25,145.975 ; R15123.2@353.375,148.635 R15123.2@353.375,148.725 ; U081.7@409.25,110.15 409.349,110.15 409.45,110.15 409.45,110.307 U081.7@409.45,110.35 ; Q2.1@419.925,146.625 419.961,146.589 Q2.1@420.15,146.4 ; R15122.2@432.175,149.525 R15122.2@432.175,149.6
IN1: IN1.2 R128031.2 | length 3.7
  Bottom Layer w1: R128031.2@522.732,207.743 IN1.2@522.732,211.408
IN2: IN2.2 R228031.2 | length 3.7
  Bottom Layer w1: R228031.2@512.572,207.722 IN2.2@512.572,211.408
IN3: IN3.2 R328031.2 | length 3.9
  Bottom Layer w1: R328031.2@502.92,207.545 R328031.2@502.92,207.692 IN3.2@502.92,211.408
IN4: IN4.2 R428031.2 | length 3.7
  Bottom Layer w1: R428031.2@493.268,207.682 R428031.2@493.268,207.692 IN4.2@493.268,211.408
IN5: IN5.2 R528031.2 | length 3.7
  Bottom Layer w1: R528031.2@484.175,207.825 484.175,211.408 IN5.2@484.175,211.5
IN6: IN6.2 R628031.2 | length 3.2
  Bottom Layer w1: R628031.2@474.472,207.653 R628031.2@474.472,207.692 IN6.2@474.472,210.9
IN7: IN7.2 R728031.2 | length 3.3
  Bottom Layer w1: R728031.2@464.82,207.63 R728031.2@464.82,207.692 IN7.2@464.82,210.9
IN8: IN8.2 R828031.2 | length 3.7
  Bottom Layer w1: R828031.2@455.168,207.707 IN8.2@455.168,211.408
IN9: IN9.2 R128032.2 | length 3.5
  Bottom Layer w1: R128032.2@446.024,207.876 IN9.2@446.024,211.408
IN10: IN10.2 R228032.2 | length 3.6
  Bottom Layer w1: R228032.2@435.85,207.725 IN10.2@435.85,211.3
IN11: IN11.2 R328032.2 | length 3.8
  Bottom Layer w1: R328032.2@426.75,207.475 426.75,207.692 IN11.2@426.75,211.25
IN12: IN12.2 R42802.2 | length 3.5
  Bottom Layer w1: R42802.2@416.56,207.89 IN12.2@416.56,211.408
IN13: IN13.2 R528032.2 | length 3.7
  Bottom Layer w1: R528032.2@407.416,207.692 IN13.2@407.416,211.408
IN14: IN14.2 R628032.2 | length 3.5
  Bottom Layer w1: R628032.2@397.256,207.894 IN14.2@397.256,211.408
IN15: IN15.2 R728032.2 | length 3.7
  Bottom Layer w1: R728032.2@388.112,207.737 IN15.2@388.112,211.408
IN16: IN16.2 R828032.2 | length 3.8
  Bottom Layer w1: R828032.2@377.952,207.648 R828032.2@377.952,207.692 IN16.2@377.952,211.408
IN17: IN17.2 R128033.2 | length 3.7
  Bottom Layer w1: R128033.2@368.808,207.708 IN17.2@368.808,211.408
IN18: IN18.2 R228033.2 | length 3.6
  Bottom Layer w1: R228033.2@359.156,207.781 IN18.2@359.156,211.408
IN19: IN19.2 R328033.2 | length 3.6
  Bottom Layer w1: R328033.2@350.012,207.788 IN19.2@350.012,211.408
IN20: IN20.2 R42803.2 | length 3.5
  Bottom Layer w1: R42803.2@339.852,207.873 IN20.2@339.852,211.408
IN21: IN21.2 R528033.2 | length 3.6
  Bottom Layer w1: R528033.2@330.725,207.725 IN21.2@330.725,211.3
IN22: IN22.2 R628033.2 | length 3.6
  Bottom Layer w1: R628033.2@320.548,207.773 IN22.2@320.548,211.408
IN23: IN23.2 R728033.2 | length 3.5
  Bottom Layer w1: R728033.2@311.404,207.871 IN23.2@311.404,211.408
IN24: IN24.2 R828033.2 | length 3.7
  Bottom Layer w1: R828033.2@301.244,207.694 IN24.2@301.244,211.408
IN25: IN25.2 R128034.2 | length 3.7
  Bottom Layer w1: R128034.2@292.1,207.725 IN25.2@292.1,211.408
IN26: IN26.2 R228034.2 | length 3.6
  Bottom Layer w1: R228034.2@281.94,207.79 IN26.2@281.94,211.408
IN27: IN27.2 R328034.2 | length 3.2
  Bottom Layer w1: R328034.2@272.75,208.275 272.75,211.408 IN27.2@272.75,211.5
IN28: IN28.2 R42804.2 | length 3.7
  Bottom Layer w1: R42804.2@263.144,207.681 R42804.2@263.144,207.692 IN28.2@263.144,211.408
IN29: IN29.2 R528034.2 | length 3.6
  Bottom Layer w1: R528034.2@253.492,207.792 IN29.2@253.492,211.408
IN30: IN30.2 R628034.2 | length 3.6
  Bottom Layer w1: R628034.2@243.84,207.815 IN30.2@243.84,211.408
IN31: IN31.2 R728034.2 | length 3.2
  Bottom Layer w1: R728034.2@234.696,208.196 R728034.2@234.696,208.2 IN31.2@234.696,211.408
IN32: IN32.2 R828034.2 | length 3.7
  Bottom Layer w1: R828034.2@224.536,207.661 R828034.2@224.536,207.692 IN32.2@224.536,211.408
IN33: IN33.2 R128035.2 | length 3.6
  Bottom Layer w1: R128035.2@215.392,207.792 IN33.2@215.392,211.408
IN34: IN34.2 R228035.2 | length 3.7
  Bottom Layer w1: R228035.2@205.74,207.692 R228035.2@205.74,207.692 IN34.2@205.74,211.408
IN35: IN35.2 R328035.2 | length 3.5
  Bottom Layer w1: R328035.2@196.088,207.863 IN35.2@196.088,211.408
IN36: IN36.2 R428035.2 | length 3.5
  Bottom Layer w1: R428035.2@185.925,207.775 IN36.2@185.925,211.25
IN37: IN37.2 R528035.2 | length 3.7
  Bottom Layer w1: R528035.2@176.784,207.709 176.784,207.726 IN37.2@176.784,211.408
IN38: IN38.2 R628035.2 | length 3.7
  Bottom Layer w1: R628035.2@167.132,207.682 R628035.2@167.132,207.692 IN38.2@167.132,211.408
IN39: IN39.2 R728035.2 | length 4.2
  Bottom Layer w1: R728035.2@157.925,207.625 157.925,207.692 IN39.2@157.925,211.8
IN40: IN40.2 R828035.2 | length 4.1
  Bottom Layer w1: R828035.2@147.828,207.692 IN40.2@147.828,211.828
LVP: P1.6
MCLR: P1.1 R1.1 U1.1 | length 54.3
  Top Layer w0: R1.1@365.68,92.456 R1.1@365.7,92.456
  Top Layer w0.5: U1.1@352.075,114.225 352.075,116.65 352.55,117.125 v1@370.55,117.125 ; R1.1@365.7,92.425 370.775,92.425 ; P1.1@370.8,89 v1@370.8,102.85
  Bottom Layer w0.5: v1@370.8,102.85 v1(370.8,102.9) v1(370.8,117.15)
NetC2_1: C2.1 U1.10 Y1.2 | length 16.3
  Top Layer w0.254: Y1.2@343.275,124.368 343.279,124.371 Y1.2@343.341,124.434
  Top Layer w0.5: U1.10@340.575,114.25 340.575,121.625 343.3,124.35 Y1.2@343.35,124.4 ; Y1.2@343.341,124.434 C2.1@343.341,129.357
NetC3_1: C3.1 U1.9 Y1.1 | length 20.4
  Top Layer w0.5: U1.9@341.912,114.095 341.912,117.712 343.553,119.353 343.553,121.203 344.984,122.634 344.984,122.684 346.525,124.225 348.341,124.225 348.425,124.225 Y1.1@348.475,124.275 ; Y1.1@348.35,124.4 351.913,127.963 C3.1@351.913,129.357
NetDP1_1: DP1.1 RP1.2 | length 7.4
  Top Layer w0.254: DP1.1@144.125,95.375 DP1.1@144.305,95.555
  Top Layer w0.5: DP1.1@144.305,95.555 DP1.1@144.388,95.555
  Bottom Layer w0.5: DP1.1@144.388,95.555 RP1.2@151.5,95.555
NetDP2_1: DP2.1 Rp2.2 | length 7.2
  Top Layer w0.254: Rp2.2@151.515,132.035 151.54,132.01 Rp2.2@151.55,132
  Top Layer w0.5: Rp2.2@151.5,132.035 Rp2.2@151.515,132.035
  Bottom Layer w0.5: DP2.1@144.388,132.035 Rp2.2@151.5,132.035
NetDRX_1: DRX.1 RRX.2 | length 15.7
  Top Layer w0.5: DRX.1@351.6,90.5 357.675,90.5 363.125,95.95 RRX.2@365.075,95.95
NetDTX_1: DTX.1 RTX.2 | length 8.4
  Bottom Layer w0.5: RTX.2@318.088,96.012 318.088,91.587 319.275,90.4 DTX.1@321.55,90.4
NetP031_1: P031.1 U1511.4 U28031.18 | length 39.4
  Top Layer w0.254: P031.1@499.2,175.8 499.308,175.692 P031.1@499.375,175.625
  Top Layer w0.5: P031.1@499.2,175.8 499.2,182.497 U28031.18@499.2,182.75
  Bottom Layer w0.5: U1511.4@486.302,159.129 486.302,158.023 487.25,157.075 497.85,157.075 499.2,158.425 P031.1@499.2,175.625
NetP031_2: P031.2 U1511.3 U28031.17 | length 54.1
  Top Layer w0.5: P031.2@496.775,175.625 496.775,175.639 496.775,182.497 U28031.17@496.775,182.75
  Bottom Layer w0.254: P031.2@496.525,176.175 P031.2@496.65,176.3
  Bottom Layer w0.5: U1511.3@483.725,159.025 483.725,157.45 485.525,155.65 499.425,155.65 501.35,157.575 501.35,176.9 500.675,177.575 496.775,177.575 ; P031.2@496.7,175.6 496.7,175.639 496.7,177.5
NetP031_3: P031.3 U1511.2 U28031.16 | length 67.9
  Top Layer w0.254: U28031.16@494.176,182.151 494.349,182.324 U28031.16@494.35,182.325
  Top Layer w0.5: P031.3@494.176,175.639 U28031.16@494.176,182.151
  Bottom Layer w0.254: 494.125,178.6 494.176,178.549 ; P031.3@494.3,176.15 P031.3@494.35,176.1
  Bottom Layer w0.5: U1511.2@481.222,159.129 481.222,156.478 483.7,154 500.8,154 503.25,156.45 503.25,177.95 502.025,179.175 494.7,179.175 494.125,178.6 ; P031.3@494.126,175.639 494.126,178.549
NetP031_4: P031.4 U1511.1 U28031.15 | length 83
  Top Layer w0.254: P031.4@491.636,175.564 P031.4@491.75,175.45
  Top Layer w0.5: P031.4@491.636,175.564 P031.4@491.636,175.639 U28031.15@491.636,182.497
  Bottom Layer w0.254: U1511.1@478.725,159.5 478.725,159.2 478.739,159.186 U1511.1@478.775,159.15 ; P031.4@491.575,175.725 491.636,175.664 491.648,175.651 P031.4@491.9,175.4
  Bottom Layer w0.5: U1511.1@478.625,159.2 478.625,159.129 478.625,155.65 482.075,152.2 501.825,152.2 505.325,155.7 505.325,178.7 503.35,180.675 492.85,180.675 491.636,179.461 491.636,175.664 P031.4@491.636,175.639 P031.4@491.636,175.564
NetP031_5: P031.5 U1511.15 U28031.14 | length 19.5
  Top Layer w0.254: P031.5@488.9,175.4 P031.5@489.075,175.575 ; P031.5@489.096,175.504 P031.5@489.15,175.45
  Bottom Layer w0.254: P031.5@488.975,175.525 489.092,175.643 P031.5@489.096,175.646
  Bottom Layer w0.5: U1511.15@481.25,166.725 489.096,174.571 P031.5@489.096,175.639 ; P031.5@489.096,175.646 U28031.14@489.096,182.497
NetP031_6: P031.6 U1511.14 U28031.13 | length 16.6
  Top Layer w0.254: P031.6@486.55,175.7 P031.6@486.556,175.706
  Top Layer w0.5: U1511.14@483.85,166.975 486.7,169.825 P031.6@486.7,175.525
  Bottom Layer w0.254: P031.6@486.556,175.769 486.621,175.704 P031.6@486.625,175.7
  Bottom Layer w0.5: P031.6@486.556,175.769 U28031.13@486.556,182.497
NetP031_7: P031.7 U1511.13 U28031.12 | length 32.1
  Top Layer w0.254: 477.125,168.7 477.15,168.725 477.15,168.775
  Top Layer w0.5: 477.125,168.7 477.125,164.65 486.3,164.65 ; 477.15,168.775 484.015,175.64 P031.7@484.05,175.675 ; 486.302,164.7 U1511.13@486.302,166.749
  Bottom Layer w0.5: P031.7@484,175.775 484,182.497 U28031.12@484,182.775
NetP031_8: P031.8 U1511.12 U28031.11 | length 39
  Top Layer w0.254: P031.8@481.35,175.625 481.42,175.695 P031.8@481.476,175.751
  Top Layer w0.5: P031.8@481.225,175.525 475.25,169.55 475.25,169.525 475.225,169.5 475.225,163.4 475.575,163.05 488.825,163.05 ; 488.842,163.067 U1511.12@488.842,166.749
  Bottom Layer w0.254: P031.8@481.476,175.874 P031.8@481.575,175.775
  Bottom Layer w0.5: P031.8@481.476,175.874 U28031.11@481.476,182.497
NetP032_1: P032.1 U1512.4 U28032.18 | length 38.9
  Top Layer w0.254: U28032.18@422.45,181.8 U28032.18@422.75,182.1
  Top Layer w0.5: P032.1@422.45,175.5 422.45,175.639 U28032.18@422.45,181.8
  Bottom Layer w0.5: U1512.4@409.525,159.2 409.525,159.129 409.525,157.875 410.05,157.35 421.775,157.35 422.4,157.975 P032.1@422.4,175.475
NetP032_2: P032.2 U1512.3 U28032.17 | length 54.2
  Top Layer w0.254: P032.2@419.95,175.5 P032.2@420.008,175.558
  Top Layer w0.5: P032.2@420.008,175.558 P032.2@420.008,175.639 U28032.17@420.008,182.497
  Bottom Layer w0.5: U1512.3@407.054,159.129 407.054,157.521 408.575,156 423.775,156 424.425,156.65 424.425,176.525 ; P032.2@420.008,175.639 420.008,177.975 422.975,177.975 424.425,176.525 ; 424.425,176.55 424.425,176.525
NetP032_3: P032.3 U1512.2 U28032.16 | length 67.4
  Top Layer w0.254: P032.3@417.3,175.5 417.453,175.654 P032.3@417.468,175.668
  Top Layer w0.5: P032.3@417.468,175.668 U28032.16@417.468,182.497
  Bottom Layer w0.5: 404.363,156.688 404.375,156.676 ; 404.375,156.625 404.375,156.676 ; U1512.2@404.375,159.1 404.375,156.676 ; P032.3@417.468,175.639 417.468,178.418 418.225,179.175 424.143,179.175 427.075,176.243 427.075,156.625 425.15,154.7 406.349,154.7 404.375,156.676
NetP032_4: P032.4 U1512.1 U28032.15 | length 80.9
  Top Layer w0.254: P032.4@414.928,175.947 P032.4@415.05,175.825
  Top Layer w0.5: P032.4@414.928,175.947 U28032.15@414.928,182.497
  Bottom Layer w0.254: 414.9,179.125 414.928,179.097
  Bottom Layer w0.5: U1512.1@401.825,158.925 401.825,155.7 404.125,153.4 426.4,153.4 429.4,156.4 429.4,177.475 426.05,180.825 416.6,180.825 414.9,179.125 ; P032.4@414.928,175.639 414.928,179.097
NetP032_5: P032.5 U1512.15 U28032.14 | length 20.6
  Bottom Layer w0.254: P032.5@412.35,175.125 412.35,175.5 412.388,175.538 412.438,175.589 P032.5@412.575,175.725 ; P032.5@412.388,175.537 412.425,175.5 412.425,174.65
  Bottom Layer w0.5: U1512.15@404.5,166.725 404.519,166.744 412.425,174.65 ; 412.388,174.7 P032.5@412.388,175.537 ; P032.5@412.388,175.538 P032.5@412.388,175.639 U28032.14@412.388,182.497
NetP032_6: P032.6 U1512.14 U28032.13 | length 17.1
  Top Layer w0.5: U1512.14@407.05,166.725 407.05,166.749 407.05,169.575 409.848,172.373 P032.6@409.848,175.639
  Bottom Layer w0.254: P032.6@409.7,175.725 409.817,175.608 P032.6@409.85,175.575
  Bottom Layer w0.5: P032.6@409.7,175.725 409.7,182.497 U28032.13@409.7,182.575
NetP032_7: P032.7 U1512.13 U28032.12 | length 32.1
  Top Layer w0.254: 409.594,165.281 409.625,165.25
  Top Layer w0.5: P032.7@407.375,175.5 399.875,168 399.875,165.425 401.075,164.225 408.6,164.225 409.625,165.25 ; 409.594,165.281 U1512.13@409.594,166.749
  Bottom Layer w0.254: P032.7@407.3,175.75 P032.7@407.308,175.758
  Bottom Layer w0.5: P032.7@407.308,175.758 U28032.12@407.308,182.497
NetP032_8: P032.8 U1512.12 U28032.11 | length 38.9
  Top Layer w0.254: 412.134,164.441 412.175,164.4
  Top Layer w0.5: P032.8@404.875,175.75 404.766,175.641 398.1,168.975 398.1,164.275 399.575,162.8 410.575,162.8 412.175,164.4 ; 412.134,164.441 U1512.12@412.134,166.749
  Bottom Layer w0.254: P032.8@404.775,175.7 P032.8@404.8,175.675
  Bottom Layer w0.5: P032.8@404.775,175.7 404.775,182.325 404.857,182.407 U28032.11@404.95,182.5
NetP033_1: P033.1 U1513.4 U28033.18 | length 39.7
  Top Layer w0.254: U28033.18@346.85,182.425 U28033.18@346.856,182.419
  Top Layer w0.5: P033.1@346.856,175.639 U28033.18@346.856,182.419
  Bottom Layer w0.5: U1513.4@333.902,158.904 333.902,158.248 335.275,156.875 346.775,156.875 346.781,175.564 P033.1@346.856,175.639